# Altium PCB Digital_Encoder_Layout_D2.PcbDoc
Units mil, origin at the board's own origin, x right, y up, seen from the top; angles counter-clockwise.
Board outline 1220.47 x 1233.89 mil, 2 copper layers (Top Layer, Bottom Layer); 10 components, 9 nets, 39 pads, 0 vias.
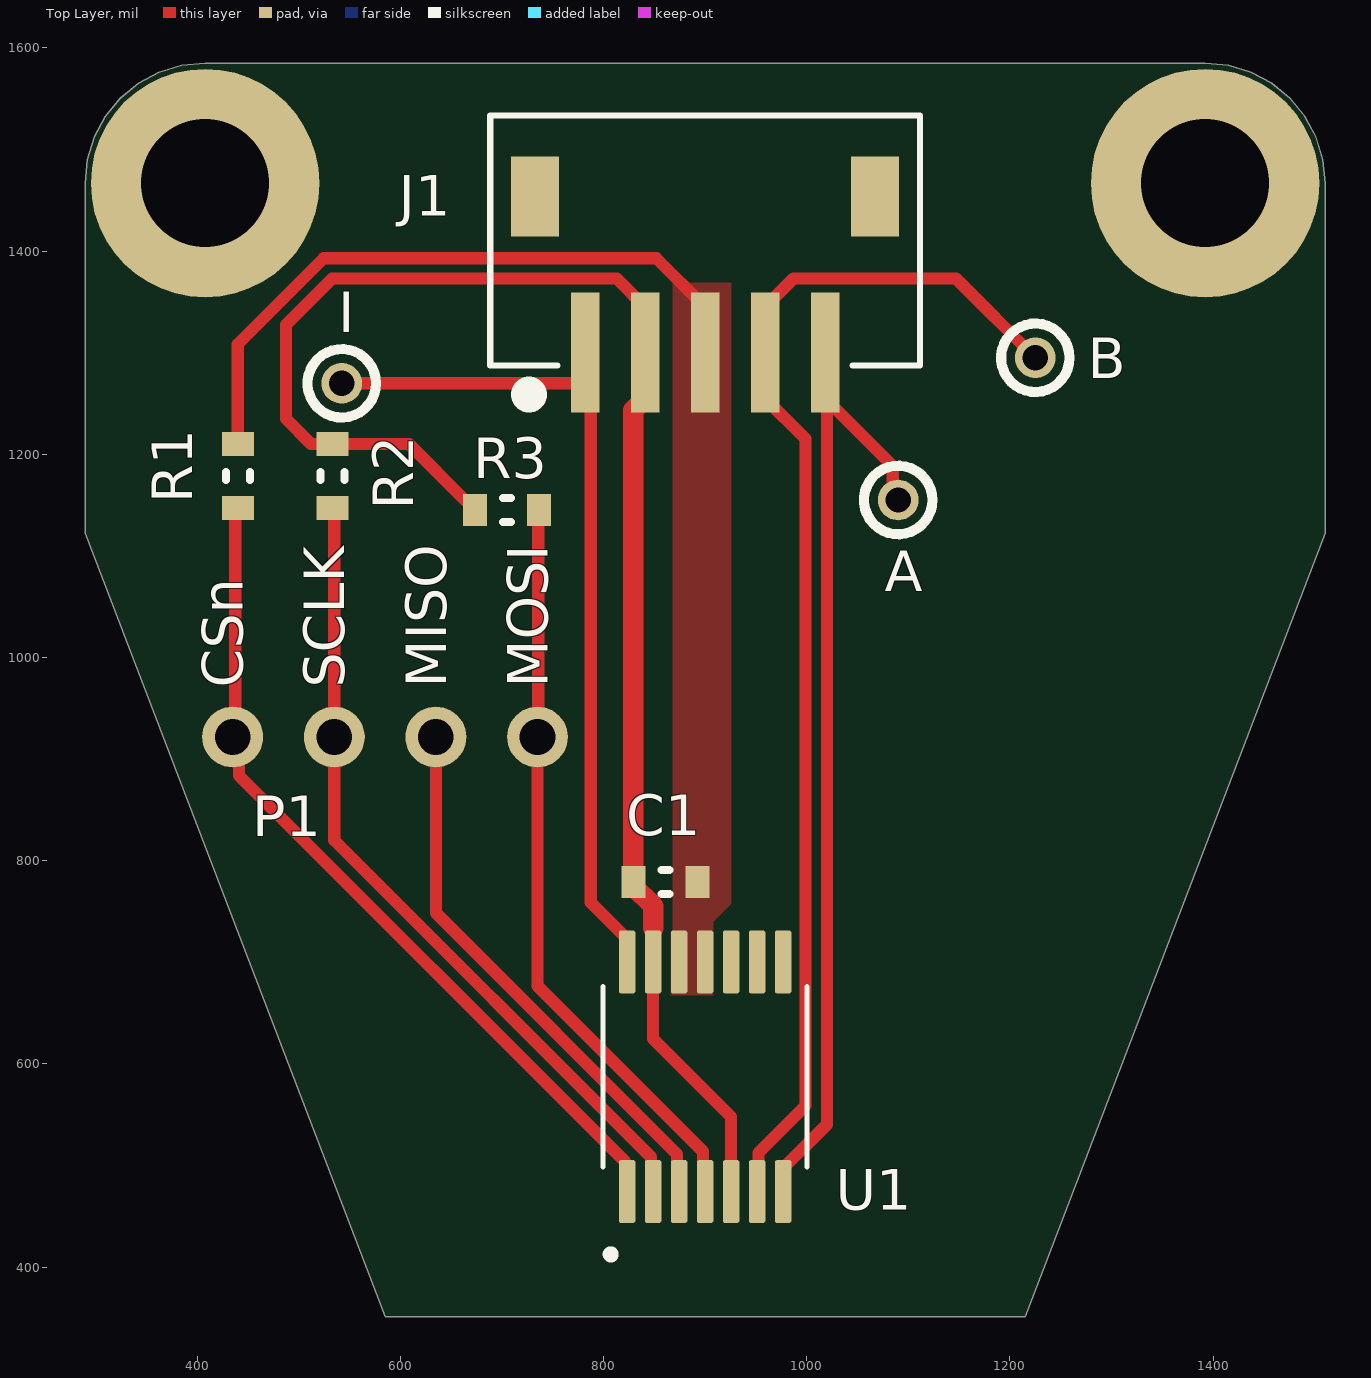
[diagram p0: Top Layer view]
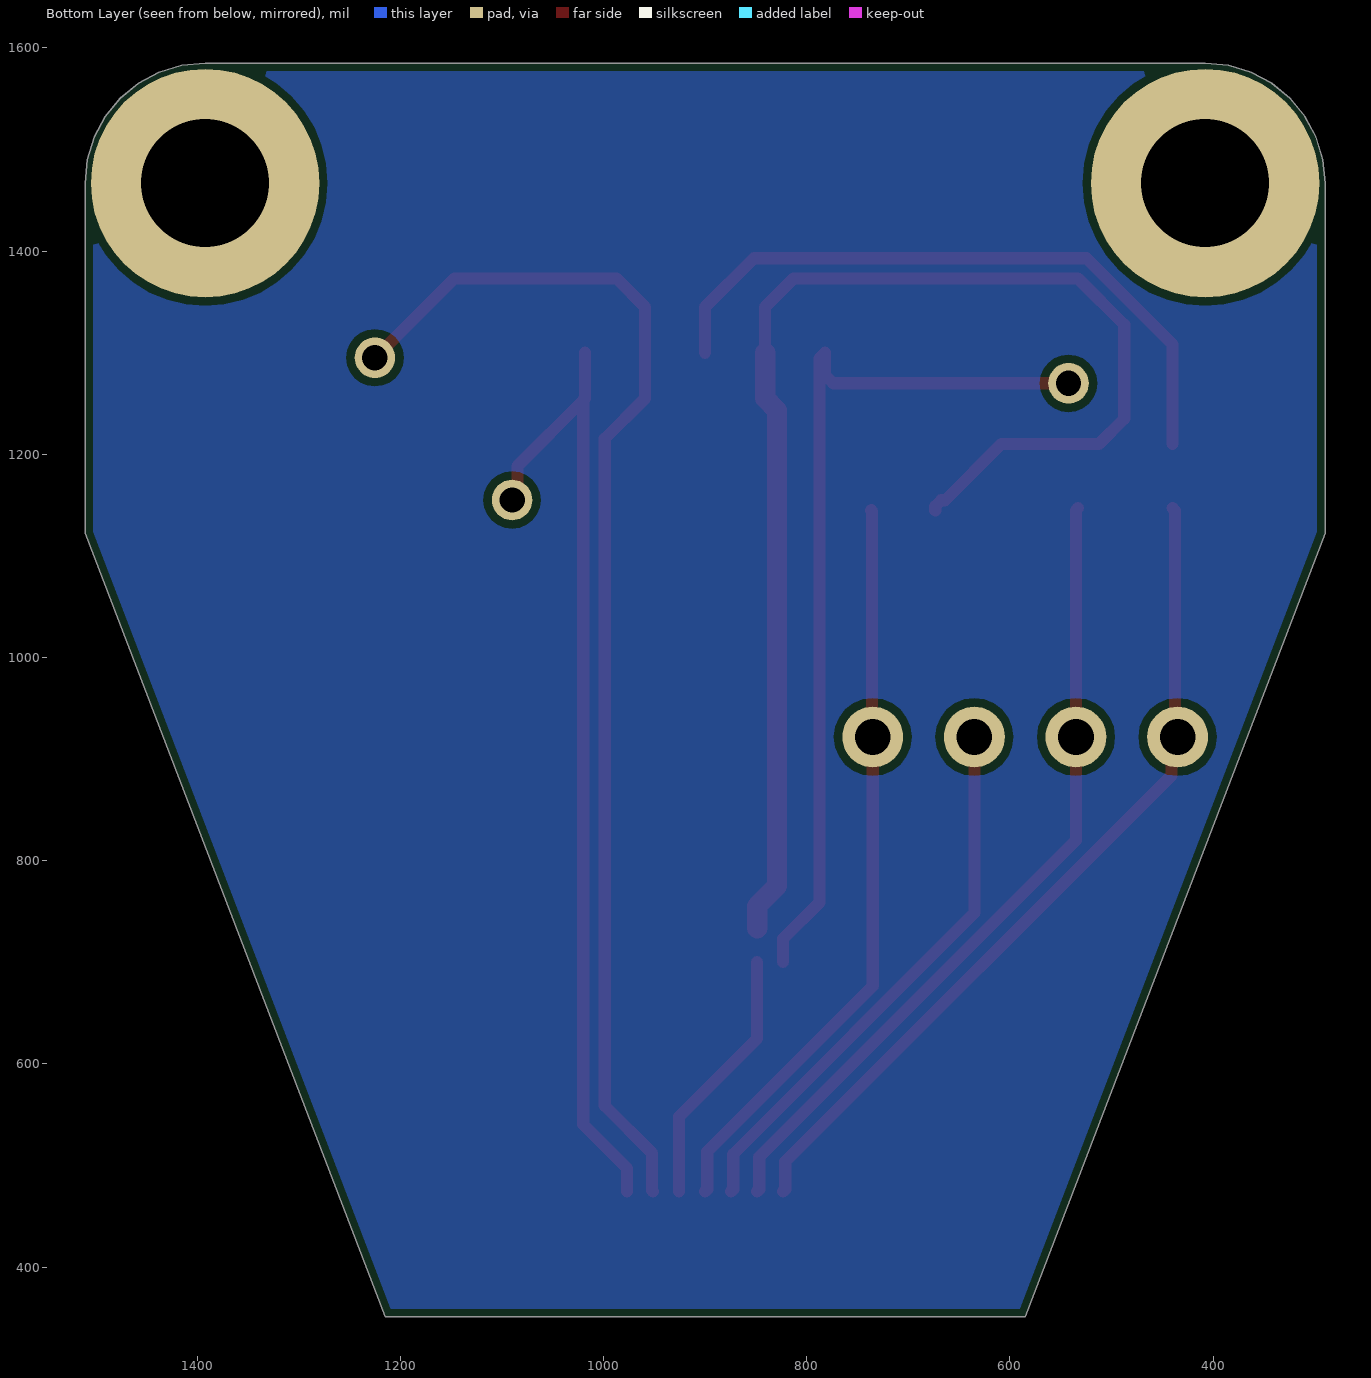
[diagram p1: Bottom Layer view, seen from below]

## Layer stack, top to bottom
Top Solder: solder mask 0.4, Solder Resist, Dk 3.5
Top Layer: signal copper 1.4
Dielectric 1: dielectric 12.6, FR-4, Dk 4.8
Bottom Layer: signal copper 1.4
Bottom Solder: solder mask 0.4, Solder Resist, Dk 3.5

## Board outline
407.87,1585 384.83,1582.73 362.68,1576.01 342.26,1565.09 324.36,1550.41 309.67,1532.51 298.75,1512.09 292.03,1489.93 289.76,1466.89 289.76,1122.31 585.04,351.11 1214.96,351.11 1510.24,1122.31 1510.24,1466.89 1507.97,1489.93 1501.25,1512.09 1490.33,1532.51 1475.64,1550.41 1457.74,1565.09 1437.32,1576.01 1415.17,1582.73 1392.13,1585

## Design rules (kind name [scope] priority, off if disabled: settings)
BoardOutlineClearance [All] p1: gap=7.87 ignorepadtopadclearanceinfootprint=FALSE except(15.75: Arc-SplitBarrior Arc-SplitContinuation Track-SplitBarrior Track-SplitContinuation SMDPad-SplitBarrior SMDPad-SplitContinuation THPad-SplitBarrior THPad-SplitContinuation Via-SplitBarrior Via-SplitContinuation Fill-SplitBarrior Fill-SplitContinuation Poly-SplitBarrior Poly-SplitContinuation Region-SplitBarrior Region-SplitContinuation Text-SplitBarrior Text-SplitContinuation)
Clearance "Clearance Bottom Layer" [OnLayer('Bottom Layer')] p1: gap=8 ignorepadtopadclearanceinfootprint=TRUE except(10: Arc-Text Track-Text SMDPad-Text THPad-Text Via-Text Fill-Text Poly-Text Region-Text Text-Text)
Clearance "Clearance Top Layer" [OnLayer('Top Layer')] p2: gap=8 ignorepadtopadclearanceinfootprint=TRUE except(10: Arc-Text Track-Text SMDPad-Text THPad-Text Via-Text Fill-Text Poly-Text Region-Text Text-Text)
Clearance [All] p3: gap=7.87 ignorepadtopadclearanceinfootprint=FALSE except(3.5: Arc-Arc Arc-Track Arc-SMDPad Track-Track Track-SMDPad SMDPad-SMDPad; 5: Arc-Via Track-Via SMDPad-Via THPad-Via Via-Via; 10: Arc-Text Track-Text SMDPad-Text THPad-Text Via-Text Fill-Text Poly-Text Region-Text Text-Text)
HoleSize [All] p1: absolutevalues=TRUE maxlimit=248.03 minlimit=7.87 maxpercent=80.000 minpercent=20.000
MinimumAnnularRing [All] p1: minimumring=3
MinimumSolderMaskSliver [All] p1: minsoldermaskwidth=3.94
PolygonConnect PolygonConnect_5 [All vs IsNamedPolygon('3V3_L01_P007')] p1: thpad.connectstyle=Direct thpad.reliefconductorwidth=10 thpad.reliefentries=4 thpad.polygonreliefangle="90 Angle" thpad.airgapwidth=10 smdpad.connectstyle=Direct smdpad.reliefconductorwidth=10 smdpad.reliefentries=4 smdpad.polygonreliefangle="90 Angle" smdpad.airgapwidth=10 via.connectstyle=Relief via.reliefconductorwidth=10 via.reliefentries=4 via.polygonreliefangle="90 Angle" via.airgapwidth=10
PolygonConnect PolygonConnect_4 [All vs IsNamedPolygon('3V3_L01_P006')] p2: thpad.connectstyle=Relief thpad.reliefconductorwidth=10 thpad.reliefentries=4 thpad.polygonreliefangle="90 Angle" thpad.airgapwidth=10 smdpad.connectstyle=Direct smdpad.reliefconductorwidth=10 smdpad.reliefentries=4 smdpad.polygonreliefangle="90 Angle" smdpad.airgapwidth=10 via.connectstyle=Relief via.reliefconductorwidth=10 via.reliefentries=4 via.polygonreliefangle="90 Angle" via.airgapwidth=10
PolygonConnect PolygonConnect_3 [All vs IsNamedPolygon('3V3_L01_P005')] p3: thpad.connectstyle=Relief thpad.reliefconductorwidth=10 thpad.reliefentries=4 thpad.polygonreliefangle="90 Angle" thpad.airgapwidth=10 smdpad.connectstyle=Direct smdpad.reliefconductorwidth=10 smdpad.reliefentries=4 smdpad.polygonreliefangle="90 Angle" smdpad.airgapwidth=10 via.connectstyle=Relief via.reliefconductorwidth=10 via.reliefentries=4 via.polygonreliefangle="90 Angle" via.airgapwidth=10
PolygonConnect PolygonConnect_2 [All vs IsNamedPolygon('3V3_L01_P003')] p4: connectstyle=Direct reliefconductorwidth=10 reliefentries=4 polygonreliefangle="90 Angle" airgapwidth=10
PolygonConnect [All vs IsNamedPolygon('3V3_L01_P002')] p5: thpad.connectstyle=Direct thpad.reliefconductorwidth=10 thpad.reliefentries=4 thpad.polygonreliefangle="90 Angle" thpad.airgapwidth=10 smdpad.connectstyle=Direct smdpad.reliefconductorwidth=10 smdpad.reliefentries=4 smdpad.polygonreliefangle="90 Angle" smdpad.airgapwidth=10 via.connectstyle=Relief via.reliefconductorwidth=10 via.reliefentries=4 via.polygonreliefangle="90 Angle" via.airgapwidth=10
PolygonConnect PolygonConnect_1 [All] p6: thpad.connectstyle=Relief thpad.reliefconductorwidth=20 thpad.reliefentries=4 thpad.polygonreliefangle="90 Angle" thpad.airgapwidth=10 smdpad.connectstyle=Relief smdpad.reliefconductorwidth=20 smdpad.reliefentries=4 smdpad.polygonreliefangle="90 Angle" smdpad.airgapwidth=10 via.connectstyle=Direct via.reliefconductorwidth=20 via.reliefentries=4 via.polygonreliefangle="90 Angle" via.airgapwidth=10
RoomDefinition Digital_Encoder_Breakout [InComponentClass('Digital_Encoder_Breakout')] p1: confinementstyle=ConfineIn formatcopy=TRUE lockcomponents=FALSE outline 0,0 2000,0 2000,1960 0,1960
RoutingCorners [All] p1: cornerstyle=Round minsetback=100 maxsetback=100
RoutingVias [All] p1: holewidth=19.68 width=39.37 viastyle="Through Hole" minholewidth=7.87 minwidth=17.72 maxholewidth=39.37 maxwidth=78.74
SilkToSilkClearance [All] p1: silktosilkclearance=3.94
SilkToSolderMaskClearance [IsPad] p1: minsilkscreentomaskgap=3.94 clearancetoexposedcopper=TRUE
SolderMaskExpansion [All] p1: expansion=4 istentingtop=FALSE
Width [All] p1: maxlimit=100 minlimit=3.5 preferedwidth=15
25 further rules are at their usual default settings.

## Components (designator, comment, footprint, x,y, rotation, side; value= is the part's Value field where it differs from the comment)
A "Test Point (Via)" TP 1090,1155 r0 top
B "Test Point (Via)" TP 1225,1295 r90 top
C1 "0.10uF" 0603 860.78,778.94 r180 top
I "Test Point (Via)" TP 542.37,1269.84 r90 top
J1 "S5B-ZR-SM4A-TF (LF) (SN)" JST_S5B-ZR-SM4A-TF 781.89,1300 r0 top
P1 "POGO 4 PIN THRU" "POGO 4 PIN THRU" 435,921.75 r0 top
R1 "4.7k" 0603 440,1178.5 r90 top
R2 "4.7k" 0603 533,1178.5 r90 top
R3 "4.7k" 0603 705,1145 r180 top
U1 "AS5047U" AS5047U 900,587.33 r90 top

## Footprints (in the part's own frame and the unit in brackets; to place one, negate y for a bottom-side part, rotate by r counter-clockwise, add the part's x,y. Pads: shape width x height; smd on the part's side, far side on the other; paste and mask are expansions set on the pad)
0603 [mm] "Chip Resistor, 2-Leads, Body 1.60x0.80mm, IPC High Density"
  rect 0.6x0.8 smd: 1(-0.8,0) 2(0.8,0)
  silkscreen extent -0.1,-0.3 0.1,0.3, body extent -0.8,-0.4 0.8,0.4, height 0.6
AS5047U [mm]
  rrect25% 1.57x0.41 smd: 1(-2.87,1.95) 2(-2.87,1.3) 3(-2.87,0.65) 4(-2.87,0) 5(-2.87,-0.65) 6(-2.87,-1.3) 7(-2.87,-1.95) 8(2.87,-1.95) 9(2.87,-1.3) 10(2.87,-0.65) 11(2.87,0) 12(2.87,0.65) 13(2.87,1.3) 14(2.87,1.95)
  silkscreen extent -4.54,-2.55 2.25,2.55
JST_S5B-ZR-SM4A-TF [mil]
  rect 28x118 smd paste+0: 1(0,0) 2(59.06,0) 3(118.11,0) 4(177.17,0) 5(236.22,0)
  rect 47x79 smd: 6(-49.21,153.62) 7(285.43,153.62)
  silkscreen extent -93,-41 330,233, body extent -88,-28 325,228, height 146
"POGO 4 PIN THRU" [mil]
  round 60 hole 35.04: 1(0,0) 2(100,0) 3(200,0) 4(300,0)
TP [mil] "Test point (40mil Standard)"
  round 40 hole 25: 1(0,0)

## Part data
C1: library part "CAP 0.10uF 16V", "CAP CER 0.10UF 16V X5R 0603/0805", Operating Temperature="-55°C ~ 85°C", Package=0603/0805, Rating=16V, Temperature Coefficient=X5R, Tolerance=10%
J1: library part "CN 5POS JST ZR RA", "Connector Header Surface Mount, Right Angle 5 position 0.059\" (1.50mm)", Mfr_Name=JST, Supplier Part Number 1=455-1696-1-ND, Copyright="Copyright (C) 2021 Ultra Librarian. All rights reserved.", Digi-Key_Part_Number_1=455-1696-2-ND, Digi-Key_Part_Number_2=455-1696-1-ND, Digi-Key_Part_Number_3=455-1696-6-ND, Manufacturer_Part_Number="S5B-ZR-SM4A-TF (LF) (SN)", RefDes=RefDes, Supplier 1=Digi-Key, Type=DEV
P1: "4 pin POGO Holes 0.100\" Pitch", ComponentLink1Description="POGO Pins", ComponentLink1URL=https://www.digikey.ca/en/products/detail/mill-max-manufacturing-corp/816-22-004-10-001101/6149707?utm_adgroup=Rectangular%20Connectors%20-%20Spring%20Loaded&utm_source=google&utm_medium=cpc&utm_campaign=Shopping_Product_Connectors%2C%20Interconnects&utm_term=&productid=6149707&gclid=CjwKCAjwyIKJBhBPEiwAu7zllx5RKB49Aiz1Tcq0lCLtxeAJbHB79ZaevgMe56kl4rzAjPwbrhvRoBoC1QsQAvD_BwE
R1 R2 R3: library part "RES 4.7k 1/8W - 5%", "RES SMD 4.7k OHM 5% 1/8W 0805", Package=0805, Power (Watts)=0.125W, Tolerance=5%
U1: "14-Bit On-Axis Magnetic Rotary Position Sensor with Up to 14-Bit Binary Incremental Pulse Count", Supplier Part Number 1=2009466, Supplier 1=RSComponents

## Free pads (board coordinates)
  round 225 hole 125.98: 1(407.87,1466.89) 1(1392.13,1466.89)
  round 225 / inner round 60 / far side round 60 hole 125.98: 5(407.87,1466.89)

## Nets (pads, with @x,y where several pads share a name; then routed paths per layer and width w, separated by ;. In a path a pad name is that pad's centre, name@x,y a point inside that pad or via, vN(x,y) a via of type N, cw(c..) or ccw(c..) an arc to the next point about the centre after c; other vN are vias at no path point)
3V3: C1.1 J1.3 R1.2 U1.11 U1.12 | length 658.3
  Top Layer w12: R1.2 440,1308.28 524.72,1393 852,1393 900,1345 J1.3
A: A.1 J1.5 U1.7 | length 971.5
  Top Layer w12: U1.7 976.77,497.17 1020,540.4 J1.5@1020,1253.11 ; J1.5 1018.11,1255 J1.5@1020,1253.11 ; A.1 1084.64,1160.36 1084.64,1188.47 J1.5@1020,1253.11
B: B.1 J1.4 U1.6 | length 1216.7
  Top Layer w12: U1.6 952.39,475.55 952.39,512.38 998.84,558.84 998.84,1215.21 959.06,1255 J1.4 959.06,1345 987.06,1373 1147,1373 B.1
CSn: P1.1 R1.1 U1.1 | length 835.5
  Top Layer w12: R1.1 437.5,1144.51 437.5,924.25 P1.1 441.07,915.69 441.07,883.93 821.16,503.84 821.16,476.41 U1.1
GND: C1.2 J1.2 R2.2 R3.2 U1.5 U1.13 | length 1584.2
  Top Layer w12: R3.2 673.5,1148.94 667.69,1154.75 663.76,1154.75 608.5,1210 R2.2 532.78,1210.22 512.2,1210.22 487.42,1235 487.42,1327.42 533,1373 812.94,1373 840.94,1345 J1.2 ; U1.13 848.82,624.68 925.59,547.91 U1.5
  Top Layer w20: J1.2 840.94,1255 829.28,1243.34 C1.2 829.28,775 848.82,755.46 848.82,733.57
I: I.1 J1.1 U1.14 | length 881.8
  Top Layer w12: I.1 773.89,1269.84 781.89,1277.84 781.89,1294.4 J1.1 787.49,1294.4 787.49,758.89 823.23,723.16 U1.14
MISO: P1.3 U1.3 | length 546.6
  Top Layer w12: P1.3 635,748.45 872.34,511.11 872.34,476.41 U1.3
MOSI: P1.4 R3.1 U1.4 | length 739.6
  Top Layer w12: R3.1 735.75,1144.25 735.75,922.5 P1.4 735,676.73 897.93,513.8 897.93,476.41 U1.4
SCLK: P1.2 R2.1 U1.2 | length 803.5
  Top Layer w12: R2.1 535,1145.01 535,820.16 846.75,508.41 846.75,476.41 U1.2
pads on no net: J1.6 J1.7 U1.8 U1.9 U1.10

## Polygon pours and split planes (outlines as drawn)
no net on Bottom Layer "NONET_L02_P001" (solid, pour order 1): 0,1695 0,155 2280,155 2280,1725
3V3 on Top Layer "3V3_L01_P007" (solid, pour order 7): 925.59,1369 925.59,757.52 908.07,740 908.07,667.44 866.34,667.44 866.34,730.05 868.36,732.06 868.36,1369

## Silkscreen, mask and mechanical layers (free items; w line width, h text height)
Top Overlay:
  circle w10: c542.37,1269.84 r33.7
  circle w10: c1090,1155 r33.7
  circle w10: c1225,1295 r33.7
  text "CSn" at 445,970 h40 r90
  text "SCLK" at 545,970 h40 r90
  text "MISO" at 645,970 h40 r90
  text "MOSI" at 745,970 h40 r90
Mechanical 1:
  the board outline again, w10

## Dimensions
1067.32,1453.62 to 1392.13,1466.89 on Dimensions
407.87,1466.89 to 732.68,1453.62 on Dimensions
407.87,1466.89 to 1392.13,1466.89 on Dimensions
1392.13,1466.89 to 900,587.33 on Dimensions